# Altium PCB EMG_channel_share_config.PcbDoc
Units mm, origin at the board's own origin, x right, y up, seen from the top; angles counter-clockwise.
Board outline 19.53 x 19.54 mm, 4 copper layers (Top Layer, SIG1, SIG2, Bottom Layer), stack 0.886 mm thick; 2 components, 31 nets, 90 pads, 143 vias.
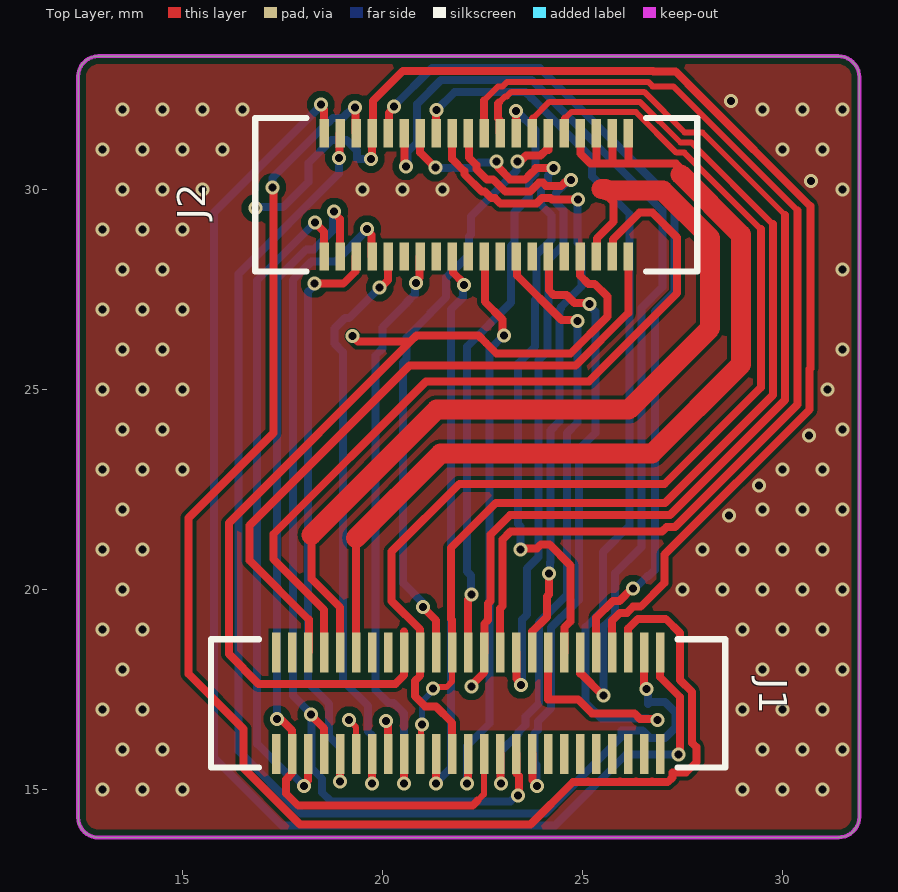
[diagram p0: Top Layer view]
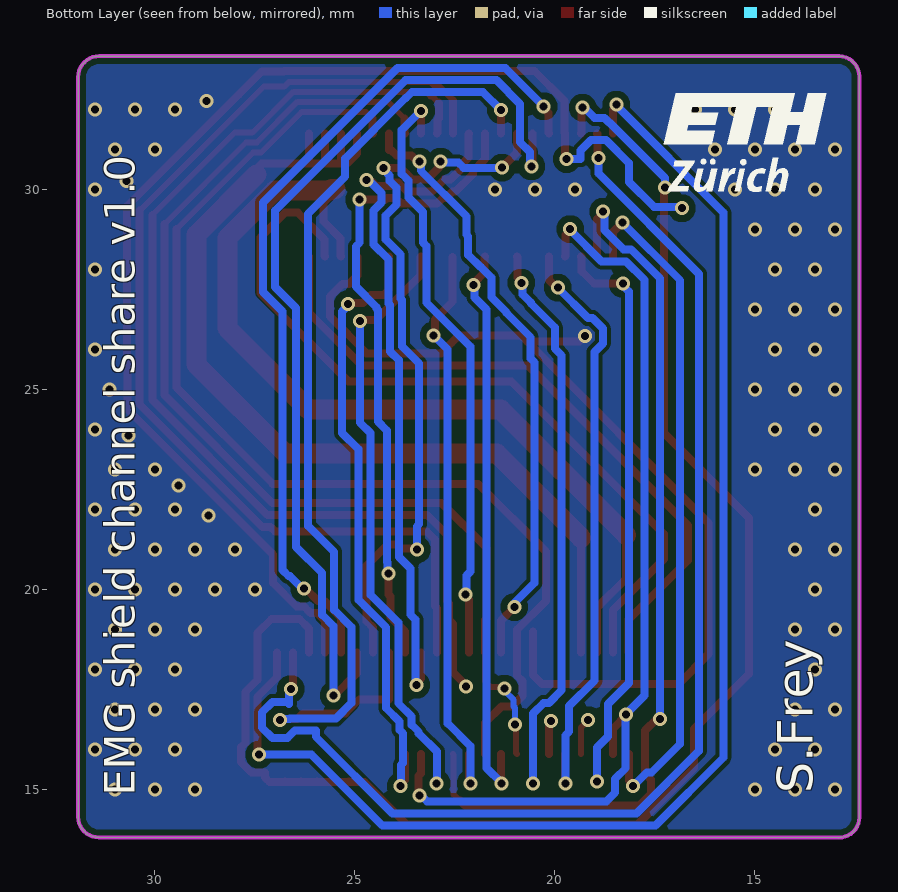
[diagram p1: Bottom Layer view, seen from below]
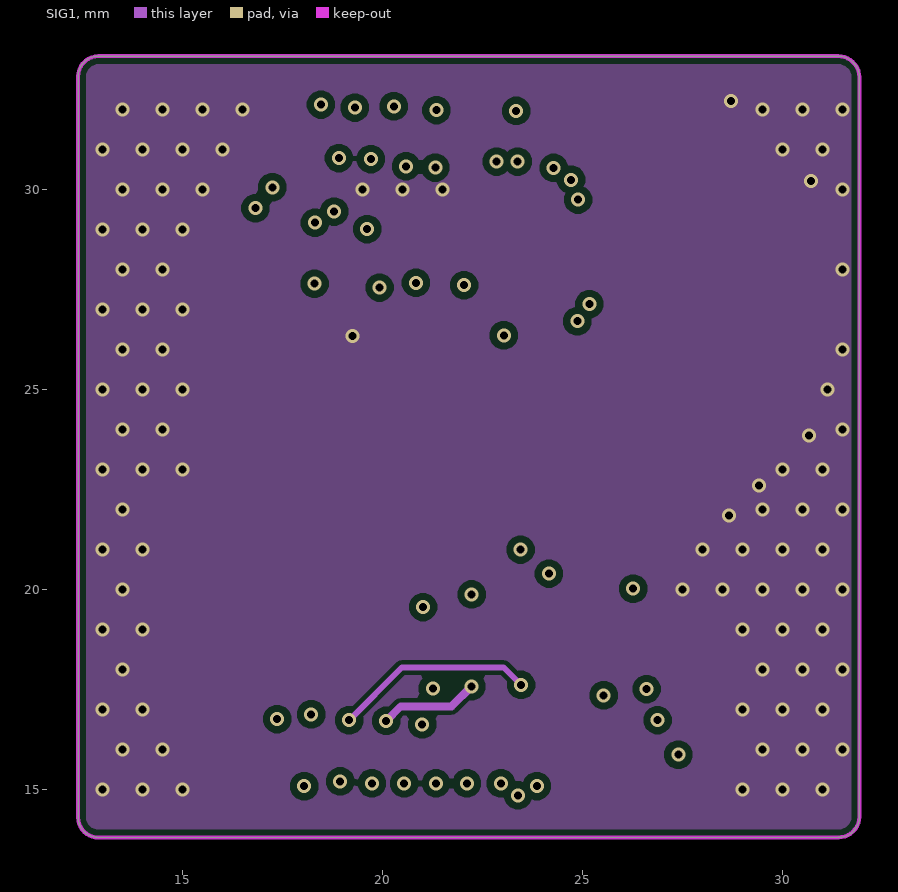
[diagram p2: SIG1]
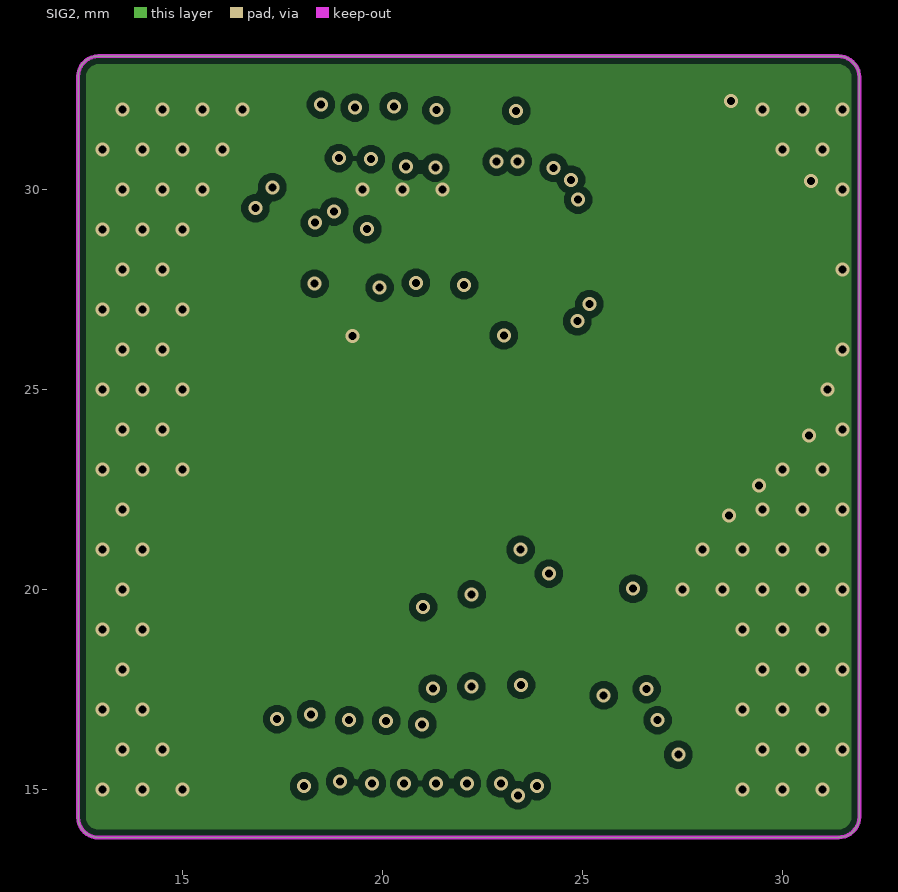
[diagram p3: SIG2]

## Layer stack, top to bottom
Top Solder: solder mask 0.0102, Solder Resist, Dk 3.5
Top Layer: signal copper 0.0175
Dielectric1: prepreg 0.13, PP-021, Dk 4.27
Dielectric2: core 0.13, Core-023, Dk 4.6
SIG1: signal copper 0.0356
Dielectric 1: prepreg 0.13, PP-021, Dk 4.27
Dielectric 2: prepreg 0.13, PP-021, Dk 4.27
SIG2: signal copper 0.0356
Dielectric 3: core 0.13, Core-023, Dk 4.6
Dielectric 4: prepreg 0.13, PP-021, Dk 4.27
Bottom Layer: signal copper 0.0175
Board Layer Stack Bottom Solder: solder mask 0.0102, Solder Resist, Dk 3.5

## Board outline
12.388,32.822 cw(c12.9,32.822) 12.9,33.334 31.389,33.334 cw(c31.389,32.803) 31.92,32.802 31.92,14.314 cw(c31.402,14.317) 31.399,13.799 12.9,13.797 cw(c12.896,14.304) 12.388,14.3

## Design rules (kind name [scope] priority, off if disabled: settings)
BoardOutlineClearance [All] p1: gap=0.2 ignorepadtopadclearanceinfootprint=FALSE
Clearance [All] p1: gap=0.102 ignorepadtopadclearanceinfootprint=FALSE except(0.127: Arc-Via Track-Via SMDPad-Via THPad-Via Via-Via Via-Fill Via-Poly Via-Region Via-Text; 0.25: Arc-Hole Track-Hole SMDPad-Hole THPad-Hole Via-Hole Fill-Hole Poly-Hole Region-Hole Text-Hole)
ComponentClearance [All] p1: gap=0.102 collisioncheckmode=3 verticalgap=0.102 showdistances=TRUE
DiffPairsRouting [All] p1: maxlimit=0.102 minlimit=0.102 mostfreqgap=0.102 toplayer_minwidth=0.102 toplayer_maxwidth=1816.048 toplayer_prefwidth=0.102 midlayer1_minwidth=0.102 midlayer1_maxwidth=1816.048 midlayer1_prefwidth=0.102 midlayer2_minwidth=0.102 midlayer2_maxwidth=1816.048 midlayer2_prefwidth=0.102 bottomlayer_minwidth=0.102 bottomlayer_maxwidth=1816.048 bottomlayer_prefwidth=0.102 maxuncoupledlength=12.7
Height [All] p1: minheight=0 maxheight=1816.048 prefheight=12.7
HoleSize [All] p1: absolutevalues=TRUE maxlimit=6.3 minlimit=0.2 maxpercent=80.000 minpercent=20.000
HoleToHoleClearance [All] p1: gap=0.25 allowstackedmicrovias=FALSE
MinimumAnnularRing [All] p1: minimumring=0.074
MinimumSolderMaskSliver [All] p1: minsoldermaskwidth=0
PlaneClearance [All] p1: clearance=0.102
PlaneConnect PlaneConnectPowerPads [InPadClass('PowerPads')] p1: planeconnectstyle=Direct reliefexpansion=0.508 reliefentries=4 reliefconductorwidth=0.254 reliefairgap=0.254
PlaneConnect [All] p2: pad.planeconnectstyle=Relief pad.reliefexpansion=0.3 pad.reliefentries=4 pad.reliefconductorwidth=0.102 pad.reliefairgap=0.102 via.planeconnectstyle=Direct via.reliefexpansion=0.3 via.reliefentries=4 via.reliefconductorwidth=0.127 via.reliefairgap=0.127
PolygonConnect PolygonConnectPowerPads [All vs (InPadClass('PowerPads'))] p1: connectstyle=Direct reliefconductorwidth=0.254 reliefentries=4 polygonreliefangle="90 Angle" airgapwidth=0.254
PolygonConnect [All] p2: thpad.connectstyle=Relief thpad.reliefconductorwidth=0.102 thpad.reliefentries=4 thpad.polygonreliefangle="90 Angle" thpad.airgapwidth=0.102 smdpad.connectstyle=Relief smdpad.reliefconductorwidth=0.102 smdpad.reliefentries=4 smdpad.polygonreliefangle="90 Angle" smdpad.airgapwidth=0.102 via.connectstyle=Direct via.reliefconductorwidth=0.127 via.reliefentries=4 via.polygonreliefangle="90 Angle" via.airgapwidth=0.127
RoutingVias [All] p1: holewidth=0.2 width=0.35 viastyle="Through Hole" minholewidth=0.2 minwidth=0.35 maxholewidth=0.2 maxwidth=0.35
SilkToSilkClearance [All] p1: silktosilkclearance=0
SilkToSolderMaskClearance [IsPad] p1: minsilkscreentomaskgap=0.102 clearancetoexposedcopper=TRUE
SolderMaskExpansion [All] p1: expansion=0.075 istentingtop=FALSE
Width [All] p1: maxlimit=1816.048 minlimit=0.102 preferedwidth=0.102
20 further rules are at their usual default settings.

## Components (designator, comment, footprint, x,y, rotation, side; value= is the part's Value field where it differs from the comment)
J1 "DF40HC3.0-50DS-0.4V51" CONN_DF40HC3.0-50DS-0.4V51_HIR 22.143,17.153 r180 top
J2 "DF40HC3.0-40DS-0.4V51" CONN40_DF40HC-40DS_HIR 18.543,28.323 r180 top

## Footprints (in the part's own frame and the unit in brackets; to place one, negate y for a bottom-side part, rotate by r counter-clockwise, add the part's x,y. Pads: shape width x height; smd on the part's side, far side on the other; paste and mask are expansions set on the pad)
CONN40_DF40HC-40DS_HIR [mil]
  rect 9x28 smd paste+0 mask+0: 1(0,-121.26) 2(0,0) 3(-15.75,-121.26) 4(-15.75,0) 5(-31.5,-121.26) 6(-31.5,0) 7(-47.25,-121.26) 8(-47.25,0) 9(-63,-121.26) 10(-63,0) 11(-78.75,-121.26) 12(-78.75,0) 13(-94.5,-121.26) 14(-94.5,0) 15(-110.25,-121.26) 16(-110.25,0) 17(-126,-121.26) 18(-126,0) 19(-141.75,-121.26) 20(-141.75,0) 21(-157.5,-121.26) 22(-157.5,0) 23(-173.25,-121.26) 24(-173.25,0) 25(-189,-121.26) 26(-189,0) 27(-204.75,-121.26) 28(-204.75,0) 29(-220.5,-121.26) 30(-220.5,0) 31(-236.25,-121.26) 32(-236.25,0) 33(-252,-121.26) 34(-252,0) 35(-267.75,-121.26) 36(-267.75,0) 37(-283.5,-121.26) 38(-283.5,0) 39(-299.25,-121.26) 40(-299.25,0)
  silkscreen extent -367,-136 68,15, body extent -358,-127 59,6, height 114
CONN_DF40HC3.0-50DS-0.4V51_HIR [mm]
  rect 0.203x1 smd paste+0 mask+0: 1(-4.8,-1.27) 2(-4.4,-1.27) 3(-4,-1.27) 4(-3.6,-1.27) 5(-3.2,-1.27) 6(-2.8,-1.27) 7(-2.4,-1.27) 8(-2,-1.27) 9(-1.6,-1.27) 10(-1.2,-1.27) 11(-0.8,-1.27) 12(-0.4,-1.27) 13(0,-1.27) 14(0.4,-1.27) 15(0.8,-1.27) 16(1.2,-1.27) 17(1.6,-1.27) 18(2,-1.27) 19(2.4,-1.27) 20(2.8,-1.27) 21(3.2,-1.27) 22(3.6,-1.27) 23(4,-1.27) 24(4.4,-1.27) 25(4.8,-1.27) 26(4.8,1.27) 27(4.4,1.27) 28(4,1.27) 29(3.6,1.27) 30(3.2,1.27) 31(2.8,1.27) 32(2.4,1.27) 33(2,1.27) 34(1.6,1.27) 35(1.2,1.27) 36(0.8,1.27) 37(0.4,1.27) 38(0,1.27) 39(-0.4,1.27) 40(-0.8,1.27) 41(-1.2,1.27) 42(-1.6,1.27) 43(-2,1.27) 44(-2.4,1.27) 45(-2.8,1.27) 46(-3.2,1.27) 47(-3.6,1.27) 48(-4,1.27) 49(-4.4,1.27) 50(-4.8,1.27)
  silkscreen extent -6.43,-1.6 6.43,1.6, body extent -6.3,-1.7 6.3,1.68, height 2.9

## Part data
J1 J2: "No Description Available", Mfr_Name=Hirose, RefDes=RefDes
  J1: Type=Type
  J2: Type="Arrays, Edge Type, Mezzanine (Board to Board)"

## Via types
v1: diameter 0.35, hole 0.2, Top Layer to Bottom Layer, tented both sides, 143 vias

## Nets (pads, with @x,y where several pads share a name; then routed paths per layer and width w, separated by ;. In a path a pad name is that pad's centre, name@x,y a point inside that pad or via, vN(x,y) a via of type N, cw(c..) or ccw(c..) an arc to the next point about the centre after c; other vN are vias at no path point)
AGND: J1.17 J2.34 | length 24.5
  Top Layer w0.2: v1(19.249,26.333) 19.388,26.194 20.691,26.194 ; 20.543,18.942 J1.17 20.543,17.863 20.319,17.638 16.903,17.638 16.159,18.382 16.159,21.661 20.691,26.194 ; J2.34@24.933,28.313 24.933,27.852 25.148,27.637 25.306,27.637 25.622,27.321 25.622,26.82 24.704,25.902 22.845,25.902 22.581,26.166 22.397,26.35 20.847,26.35 20.691,26.194
  other v1: 13,15 14,15 15,15 29,15 30,15 31,15 13.5,16 14.5,16 29.5,16 30.5,16 31.5,16 13,17 14,17 29,17 30,17 31,17 13.5,18 29.5,18 30.5,18 31.5,18 13,19 14,19 29,19 30,19 31,19 13.5,20 27.5,20 28.5,20 29.5,20 30.5,20 31.5,20 13,21 14,21 28,21 29,21 30,21 31,21 28.658,21.842 13.5,22 29.5,22 30.5,22 31.5,22 29.408,22.592 13,23 14,23 15,23 30,23 31,23 30.658,23.842 13.5,24 14.5,24 31.5,24 13,25 14,25 15,25 31.129,25 13.5,26 14.5,26 31.5,26 13,27 14,27 15,27 13.5,28 14.5,28 31.5,28 13,29 14,29 15,29 13.5,30 14.5,30 15.5,30 19.5,30 20.5,30 21.5,30 31.5,30 30.706,30.206 13,31 14,31 15,31 16,31 30,31 31,31 13.5,32 14.5,32 15.5,32 16.5,32 29.5,32 30.5,32 31.5,32 28.706,32.206
DVDD: J1.21 J2.36 | length 22.8
  Top Layer w0.2: 18.224,21.366 18.224,20.266 18.943,19.547 J1.21 ; J2.36 25.358,28.337 25.358,28.776 25.779,29.198 25.779,29.67 25.479,29.97 25.479,30.006
  Top Layer w0.5: 18.224,21.366 21.352,24.494 26.155,24.494 28.19,26.529 28.19,28.787 27.007,29.97 25.613,29.97 25.578,30.006 25.479,30.006
I2C_A_SCL: J1.22 J2.38 | length 20
  Top Layer w0.2: J1.22 18.543,19.485 17.271,20.757 17.271,21.38 21.089,25.198 25.156,25.198 27.364,27.406 27.364,28.799 26.746,29.417 26.425,29.417 25.758,28.75 25.758,28.337 J2.38
I2C_A_SDA: J1.23 J2.40 | length 16.9
  Top Layer w0.2: J1.23@18.157,18.437 18.157,19.242 16.672,20.727 16.672,21.598 20.674,25.601 24.829,25.601 26.144,26.915 J2.40
NetJ1_1: J1.1 J2.1 | length 34
  Top Layer w0.2: v1(18.461,32.122) 18.461,32.081 18.543,32 J2.1 ; J1.1 26.943,17.805 27.433,17.315 v1@27.433,15.868
  Bottom Layer w0.2: v1(18.461,32.122) 18.461,32.098 15.788,29.425 15.788,29.284 15.788,15.792 17.482,14.099 24.313,14.099 26.082,15.868 v1(27.395,15.868)
NetJ1_2: J1.2 J2.3 | length 31.8
  Top Layer w0.2: v1(18.91,30.785) 18.929,30.803 18.929,31.389 J2.3 ; J1.2 26.543,17.568 v1(26.602,17.51)
  Bottom Layer w0.2: v1(18.91,30.785) 18.91,30.402 16.396,27.888 16.396,15.965 17.961,14.401 24.059,14.401 25.977,16.319 25.977,16.47 26.501,16.47 26.689,16.283 27.062,16.283 27.325,16.546 27.325,16.919 27.062,17.183 26.689,17.183 26.641,17.135 26.641,17.549 v1(26.602,17.51)
NetJ1_3: J1.3 J2.5 | length 37.9
  Top Layer w0.2: v1(17.245,30.053) 17.274,30.025 17.274,29.799 17.274,23.913 15.148,21.786 15.148,17.89 16.525,16.512 16.525,15.534 17.934,14.125 23.702,14.125 24.758,15.181 25.128,15.181 25.143,15.196 25.158,15.181 25.928,15.181 25.943,15.196 25.958,15.181 26.328,15.181 26.343,15.196 26.358,15.181 26.728,15.181 26.743,15.196 26.758,15.181 27.128,15.181 27.247,15.299 27.247,15.418 27.581,15.418 27.845,15.681 27.845,16.054 27.735,16.164 27.735,17.44 27.439,17.736 27.439,18.908 27.08,19.266 26.388,19.266 26.143,19.021 J1.3 ; v1(19.307,32.046) 19.329,32.025 19.329,31.417 J2.5
  Bottom Layer w0.2: v1(17.245,30.053) 17.245,30.286 18.631,31.672 18.648,31.672 18.758,31.782 19.003,31.782 19.267,32.046 v1(19.307,32.046)
NetJ1_4: J1.4 J2.7 | length 31.7
  Top Layer w0.2: v1(19.707,30.759) 19.743,30.795 J2.7 19.757,31.417 19.757,32.21 20.514,32.966 26.758,32.966 26.772,32.952 27.323,32.952 27.914,32.361 30.696,29.58 30.696,25.52 30.679,25.504 30.679,24.5 27.05,20.871 27.05,20.164 26.454,19.568 26.263,19.568 26.106,19.411 25.931,19.411 25.743,19.223 J1.4
  Bottom Layer w0.2: v1(16.824,29.529) 16.853,29.558 17.516,29.558 18.145,30.187 18.145,30.656 18.724,31.235 19.097,31.235 19.36,30.971 19.36,30.759 v1(19.707,30.759)
NetJ1_5: J1.5 J2.9 | length 21.8
  Top Layer w0.2: J2.9 20.157,31.417 20.157,31.911 20.282,32.036 v1(20.282,32.076) ; J1.5 25.343,19.296 25.759,19.712 25.921,19.712 26.227,20.018 v1(26.267,20.018)
  Bottom Layer w0.2: v1(20.282,32.076) 21.239,33.034 23.933,33.034 27.297,29.67 27.297,27.436 26.807,26.946 26.807,20.483 26.653,20.329 26.619,20.329 26.308,20.018 v1(26.267,20.018)
NetJ1_6: J1.6 J2.11 | length 24.3
  Top Layer w0.2: J2.11@20.554,31.392 20.554,30.611 v1(20.589,30.577) ; J1.6 24.943,17.895 24.959,17.895 25.502,17.352 v1(25.531,17.352)
  Bottom Layer w0.2: v1(20.589,30.577) 20.589,30.617 20.619,30.648 20.619,30.932 20.868,31.181 20.868,32.139 21.461,32.733 23.73,32.733 26.995,29.467 26.995,27.561 26.473,27.038 26.473,21.062 25.817,20.407 25.817,19.366 25.531,19.079 v1(25.531,17.352)
NetJ1_7: J1.7 J2.13 | length 18.3
  Top Layer w0.2: J2.13 20.943,30.922 v1(21.319,30.546) ; v1(22.855,30.697) 22.883,30.669 22.883,30.557 23.193,30.247 23.566,30.247 23.701,30.382 23.83,30.511 23.83,30.536 v1(24.28,30.536) ; v1(23.45,20.995) 23.478,21.024 23.857,21.024 23.961,21.127 24.171,21.127 24.703,20.596 24.703,19.204 24.545,19.046 24.545,18.424 J1.7
  Bottom Layer w0.2: v1(21.319,30.546) 21.324,30.541 22.28,30.541 22.407,30.669 22.826,30.669 v1(22.855,30.697) ; v1(23.45,20.995) 23.45,21.575 23.392,21.632 23.392,25.65 23.817,26.075 23.817,27.236 23.853,27.272 23.853,28.372 24.229,28.748 24.229,29.348 23.959,29.618 23.959,30.043 24.131,30.215 24.131,30.347 24.28,30.495 v1(24.28,30.536)
NetJ1_8: J1.8 J2.15 | length 25.9
  Top Layer w0.2: J2.15 21.343,31.978 v1(21.348,31.983) ; J1.8 24.143,17.253 24.889,17.253 25.24,16.902 26.3,16.902 26.441,16.762 26.847,16.762 v1(26.875,16.733)
  Bottom Layer w0.2: v1(21.348,31.983) 21.796,32.431 23.576,32.431 23.717,32.289 23.728,32.289 25.241,30.776 25.241,30.32 26.171,29.391 26.171,21.59 25.516,20.935 25.516,19.491 25.081,19.056 25.081,17.166 25.474,16.772 26.626,16.772 26.637,16.762 26.847,16.762 v1(26.875,16.733)
NetJ1_9: J1.9 J2.17 | length 16.2
  Top Layer w0.2: J2.17 21.743,30.758 22.046,30.456 22.046,30.381 22.481,29.946 22.556,29.946 22.722,29.779 22.808,29.779 22.944,29.644 23.848,29.644 23.988,29.784 24.197,29.784 24.235,29.746 v1(24.888,29.746) ; J1.9 23.743,18.946 24.11,19.313 24.11,19.82 24.161,19.871 v1(24.161,20.395)
  Bottom Layer w0.2: v1(24.161,20.395) 24.19,20.424 24.19,20.672 24.201,20.684 24.201,23.975 24.42,24.194 24.42,26.986 24.457,27.023 24.457,27.055 24.971,27.569 24.971,28.577 24.879,28.669 24.879,29.737 v1(24.888,29.746)
NetJ1_10: J1.10 J1.31 J2.19 | length 24
  Top Layer w0.15: v1(19.167,16.732) 19.167,16.728 19.343,16.552 J1.31
  Top Layer w0.2: J2.19 22.158,31.389 22.158,30.794 22.347,30.605 22.347,30.506 22.606,30.247 22.767,30.247 23.068,29.946 23.691,29.946 23.914,30.169 24.011,30.169 24.093,30.086 24.466,30.086 24.549,30.169 24.601,30.169 24.674,30.241 v1(24.714,30.241) ; J1.10 23.345,18.421 23.345,17.772 23.464,17.652 v1(23.464,17.612)
  SIG1 w0.15: v1(19.167,16.732) 20.486,18.051 23.025,18.051 v1(23.464,17.612)
  Bottom Layer w0.2: v1@23.464,17.571 v1(23.464,17.612) 23.486,17.633 23.486,19.242 23.612,19.368 23.612,20.521 23.9,20.809 23.9,25.731 24.119,25.95 24.119,27.111 24.155,27.148 24.155,28.247 24.53,28.623 24.53,29.473 24.333,29.671 24.333,29.907 24.596,30.171 24.603,30.171 24.674,30.241 v1(24.714,30.241)
NetJ1_11: J1.11 J2.21 | length 26.7
  Top Layer w0.15: 22.543,32.228 22.893,32.578 23.004,32.578 23.116,32.69 26.644,32.69 26.755,32.578 27.271,32.578 30.378,29.471
  Top Layer w0.2: J2.21 22.543,32.228 ; J1.11 22.943,19.526 23,19.582 23,21.244 23.201,21.445 26.99,21.445 27.106,21.56 27.313,21.56 30.378,24.625 30.378,29.471
NetJ1_12: J1.12 J1.33 J2.23 | length 30
  Top Layer w0.15: 22.909,32.167 23.068,32.327 23.108,32.327 23.22,32.438 26.54,32.438 27.555,31.423 27.999,31.423 30.061,29.361
  Top Layer w0.2: v1(20.093,16.713) 20.093,16.673 20.142,16.624 20.142,15.884 J1.33 ; v1(22.222,17.573) 22.222,17.604 22.542,17.924 22.542,18.421 J1.12 22.545,18.424 22.545,19.139 22.641,19.235 22.641,19.65 22.698,19.707 22.698,21.369 23.192,21.862 27.188,21.862 30.061,24.735 30.061,29.361 ; 22.909,32.167 22.893,32.152 22.893,31.774 22.929,31.738 22.929,31.417 J2.23
  SIG1 w0.2: v1(20.093,16.713) 20.458,17.079 21.065,17.079 21.072,17.072 21.72,17.072 v1(22.222,17.573)
NetJ1_13: J1.13 J2.25 | length 15.1
  Top Layer w0.2: J1.13 22.143,19.748 22.229,19.833 v1(22.229,19.874) ; J2.25 v1(23.343,31.961)
  Bottom Layer w0.2: v1(22.229,19.874) 22.21,19.893 22.21,20.349 22.11,20.449 22.11,26.067 23.214,27.171 23.214,28.586 23.299,28.671 23.299,29.436 23.658,29.795 23.658,30.217 23.83,30.389 23.83,31.483 23.353,31.961 v1(23.343,31.961)
NetJ1_14: J1.14 J1.35 J2.27 | length 27.4
  Top Layer w0.15: J1.35 20.968,15.908 20.968,16.604 v1(20.993,16.629) ; v1(21.258,17.522) 21.296,17.56 21.604,17.56 21.743,17.699 J1.14 ; 23.758,31.772 24.172,32.187 26.435,32.187 27.451,31.171 27.722,31.171 29.76,29.134
  Top Layer w0.2: J1.14 21.743,19.229 21.709,19.263 21.709,21.04 22.833,22.164 27.063,22.164 29.76,24.86 29.76,29.134 ; J2.27 23.758,31.417 23.758,31.772
  Bottom Layer w0.15: v1(20.993,16.629) 20.993,17.04 21.03,17.078 21.03,17.24 21.258,17.468 v1(21.258,17.522)
NetJ1_15: J1.15 J2.29 | length 15.1
  Top Layer w0.2: v1(21.014,19.558) 21.014,19.552 21.343,19.223 J1.15 ; v1(23.38,30.697) 23.437,30.697 23.586,30.846 23.953,30.846 24.093,30.986 24.143,30.986 J2.29
  Bottom Layer w0.2: v1(21.014,19.558) 21.014,19.661 20.509,20.166 20.509,25.677 20.604,25.772 20.604,26.303 21.205,26.904 21.205,26.922 21.588,27.305 21.588,27.783 21.588,27.793 21.851,28.057 21.862,28.057 22.166,28.361 22.166,28.821 22.212,28.867 22.212,29.328 23.351,30.467 23.351,30.669 v1(23.38,30.697)
NetJ1_16: J1.16 J1.37 J2.31 | length 27.4
  Top Layer w0.15: 24.558,31.772 24.721,31.935 26.331,31.935 27.346,30.92 27.547,30.92 29.458,29.009
  Top Layer w0.2: J1.37 21.743,16.664 21.336,17.072 21.186,17.072 21.179,17.079 21.065,17.079 20.808,17.335 20.808,17.708 20.942,17.842 20.942,18.421 J1.16 20.942,18.424 20.942,18.994 20.225,19.711 20.225,20.944 21.922,22.641 27.055,22.641 29.458,25.044 29.458,29.009 ; J2.31 24.558,31.417 24.558,31.772
NetJ1_20: J1.20 J2.33 J2.35 J2.37 J2.39 | length 25.3
  Top Layer w0.2: J1.20 19.343,21.288 ; J2.33 24.944,30.896 25.197,30.643 25.347,30.643 ; J2.35 25.344,30.647 25.347,30.643 ; J2.37 25.744,30.665 25.722,30.643 ; J2.39 26.144,30.643 ; 27.453,30.375 27.453,30.526 27.336,30.643 26.144,30.643 ; 25.347,30.643 25.722,30.643 ; 25.722,30.643 26.144,30.643
  Top Layer w0.5: 19.343,21.288 21.452,23.397 26.736,23.397 28.959,25.619 28.959,28.869 27.453,30.375
NetJ1_27: J1.27 J1.39 J2.4 | length 22.9
  Top Layer w0.15: 22.374,14.718 22.533,14.878 22.533,15.328 22.532,15.33 22.532,15.871 J1.39
  Top Layer w0.2: v1(17.366,16.759) 17.453,16.759 17.743,16.469 J1.27 17.742,15.881 17.742,15.414 17.647,15.319 17.647,15.299 17.593,15.246 17.593,14.893 17.894,14.592 22.247,14.592 22.374,14.718 ; v1(18.792,29.446) 18.792,29.406 18.943,29.255 J2.4
  Bottom Layer w0.2: v1(17.366,16.759) 17.366,27.771 18.097,28.502 18.283,28.502 18.763,28.982 18.763,29.418 v1(18.792,29.446)
NetJ1_28: J1.28 J2.2 | length 17
  Top Layer w0.2: v1(18.043,15.079) 18.043,15.12 18.142,15.218 J1.28 J1.28 ; v1(18.312,29.167) 18.543,28.936 J2.2
  Bottom Layer w0.2: v1(18.043,15.079) 17.695,15.427 17.578,15.427 16.866,16.139 16.866,27.728 18.306,29.167 v1(18.312,29.167)
NetJ1_29: J1.29 J1.41 J2.8 | length 23.5
  Top Layer w0.2: v1(18.218,16.877) 18.218,16.848 18.542,16.524 18.542,15.884 J1.29 ; v1(19.616,29.009) 19.616,28.969 19.729,28.856 19.729,28.337 J2.8 ; J1.41 23.345,15.881 23.345,15.402 23.408,15.339 23.408,14.871 v1(23.388,14.851)
  Bottom Layer w0.2: v1(18.218,16.877) 18.218,16.888 17.761,17.345 17.761,27.739 18.222,28.2 18.831,28.2 19.616,28.985 v1(19.616,29.009) ; v1@18.229,16.877 18.229,15.529 18.493,15.265 18.493,14.918 18.709,14.702 23.199,14.702 23.348,14.851 v1(23.388,14.851)
NetJ1_30: J1.30 J2.6 | length 15.1
  Top Layer w0.2: v1(18.3,27.642) 19.017,27.642 19.329,27.954 19.329,28.309 J2.6 ; v1(18.943,15.2) J1.30
  Bottom Layer w0.2: v1(18.3,27.642) 18.3,27.601 18.143,27.444 18.143,17.657 18.668,17.132 18.668,16.324 18.943,16.049 v1(18.943,15.2)
NetJ1_32: J1.32 J2.10 | length 14.9
  Top Layer w0.2: v1(19.735,15.152) 19.742,15.159 J1.32 J1.32 ; v1(19.926,27.547) 19.957,27.547 20.143,27.734 J2.10
  Bottom Layer w0.2: v1(19.735,15.152) 19.735,16.352 19.643,16.444 19.643,17.082 19.008,17.716 19.008,25.937 18.799,26.147 18.799,26.519 19.063,26.783 19.168,26.783 19.926,27.541 v1(19.926,27.547)
NetJ1_34: J1.34 J2.14 | length 14.7
  Top Layer w0.2: v1(20.543,15.152) J1.34 ; v1(20.836,27.666) 20.836,27.707 20.929,27.8 20.929,28.309 J2.14
  Bottom Layer w0.2: v1(20.543,15.152) 20.543,16.9 20.279,17.163 20.147,17.163 19.831,17.479 19.831,25.852 20.001,26.022 20.001,26.553 20.602,27.154 20.602,27.172 20.807,27.378 20.807,27.638 v1(20.836,27.666)
NetJ1_36: J1.36 J2.18 | length 14.3
  Top Layer w0.2: v1(21.339,15.152) 21.342,15.155 21.342,15.881 J1.36 ; J2.18 21.757,28.309 21.757,27.928 22.038,27.647 v1(22.038,27.607)
  Bottom Layer w0.2: v1(21.339,15.152) 21.339,15.17 21.708,15.539 21.708,26.999 22.009,27.3 22.009,27.578 v1(22.038,27.607)
NetJ1_38: J1.38 J2.22 | length 14.5
  Top Layer w0.2: v1(22.108,15.152) 22.108,15.193 22.142,15.226 22.142,15.881 J1.38 ; J2.22@22.555,28.311 22.558,28.309 22.558,27.193 23.003,26.748 23.003,26.381 v1(23.031,26.352)
  Bottom Layer w0.2: v1(22.108,15.152) 22.108,16.081 22.679,16.652 22.679,26 v1(23.031,26.352)
NetJ1_40: J1.40 J2.26 | length 15.6
  Top Layer w0.2: J1.40 22.945,15.881 22.945,15.165 v1(22.958,15.152) ; J2.26 23.358,28.309 23.358,27.854 24.478,26.733 24.841,26.733 v1(24.87,26.705)
  Bottom Layer w0.2: v1(22.958,15.152) 22.948,15.162 22.948,15.944 23.405,16.401 23.405,16.44 23.58,16.615 23.58,16.822 23.914,17.156 23.914,19.169 24.611,19.866 24.611,23.909 24.87,24.168 v1(24.87,26.705)
NetJ1_42: J1.42 J2.30 | length 15.6
  Top Layer w0.2: J1.42 23.745,15.881 23.745,15.235 23.859,15.121 v1(23.859,15.085) ; J2.30 24.158,28.309 24.158,27.48 24.275,27.363 24.597,27.363 24.797,27.163 25.143,27.163 v1(25.172,27.134)
  Bottom Layer w0.2: v1(23.859,15.085) 23.848,15.095 23.848,15.613 23.794,15.666 23.794,16.403 23.882,16.49 23.882,16.697 24.216,17.031 24.216,19.044 24.774,19.602 24.912,19.741 24.912,23.505 25.32,23.913 25.32,26.946 25.172,27.094 v1(25.172,27.134)
pads on no net: J1.18 J1.19 J1.24 J1.25 J1.26 J1.43 J1.44 J1.45 J1.46 J1.47 J1.48 J1.49 J1.50 J2.12 J2.16 J2.20 J2.24 J2.28 J2.32

## Polygon pours and split planes (outlines as drawn)
AGND on Top Layer "AGND_L01_P000" (solid, pour order 0): 9.875,12.65 9.875,34.175 34.2,34.175 34.2,12.675 34.2,12.65
AGND on SIG1 "AGND_L02_P002" (solid, pour order 2): 9.2,34.6 9.2,12.025 34.75,12.025 34.75,34.575 34.775,34.6 9.175,34.6
AGND on SIG2 "AGND_L03_P003" (solid, pour order 3): 9.625,12.925 34.069,12.925 34.056,34.488 9.625,34.5
AGND on Bottom Layer "AGND_L04_P004" (solid, pour order 4): 9.975,34.625 9.975,13 9.95,12.975 34.025,12.975 34.025,34.575 9.9,34.575

## Keep-outs
Keep-Out Layer:
  the board outline again, w0.1

## Silkscreen, mask and mechanical layers (free items; w line width, h text height)
Board Layer Stack Bottom Overlay:
  drawing of 10 lines, arcs and shapes, not listed
  text "S.Frey" at 13.258,14.898 h1.52 r270
  text "EMG shield channel share v1.0" at 30.258,14.837 h1.3 r270
Mechanical 1:
  text ".Pcb_File_Name_No_Path" at 0,-2.5 h1.52